# EAGLE board IG1_LEDProjekt (EAGLE 9.7.0)

Size 87.97 x 144.84 mm. Coordinates in mm from the lower left corner, seen from the top.
Outline: 0,0 87.97,0 87.97,144.84 0,144.84 0,0
Copper layers (1*16): Top 0.035mm / dielectric 1.5mm / Bottom 0.035mm
Design rules "default": minimum track width 6mil, minimum drill 0.35mm, track to track 6mil, track to pad 6mil, pad to pad 6mil, via to via 6mil, smd to smd 6mil, copper to edge 40mil, drill to drill 6mil, minimum pad ring 10mil, minimum via ring 8mil, stop-mask expansion 4mil, vias tented up to drill 0mil, thermal gap 10mil

## Footprints (pad centres in the part's own frame; a part is rotated, then mirrored left to right if it is on the bottom)
LEDRD254W60D565H860B_G = drill 0.981 pad 1.581: 1 -1.27,0; 2 1.27,0
LEDRD254W60D565H860B_Y = drill 0.981 pad 1.581: 1 -1.27,0; 2 1.27,0
LEDRD254W60D565H860B = drill 0.981 pad 1.581: 1 -1.27,0; 2 1.27,0
LEDRD254W60D565H860B_B = drill 0.981 pad 1.581: 1 -1.27,0; 2 1.27,0
HC-SR04 = drill 1.016 long: 1 -3.81,0; 2 -1.27,0; 3 1.27,0; 4 3.81,0
RESAD1016W63L850D250B = drill 0.83 pad 1.43: 1 -5.08,0; 2 5.08,0
SWITCH-MOMENTARY-PTH-6.5MM = drill 1.016 pad 1.88: 1 -3.251,2.261; 2 3.251,2.261; 3 -3.251,-2.261; 4 3.251,-2.261
ARDUINO-UNO-R3-SHIELD = drill 1.016 pad 1.88: 3.3V 24.13,-2.54; 5V 24.13,0; A0 24.13,12.7; A1 24.13,15.24; A2 24.13,17.78; A3 24.13,20.32; A4 24.13,22.86; A5 24.13,25.4; AREF -24.13,-13.97; D2 -24.13,20.32; D3 -24.13,17.78; D4 -24.13,15.24; D5 -24.13,12.7; D6 -24.13,10.16; D7 -24.13,7.62; D8 -24.13,3.81; D9 -24.13,1.27; D10 -24.13,-1.27; D11 -24.13,-3.81; D12 -24.13,-6.35; D13 -24.13,-8.89; GND@0 24.13,2.54; GND@1 24.13,5.08; GND@2 -24.13,-11.43; IOREF 24.13,-7.62; NC 24.13,-10.16; RES 24.13,-5.08; RX -24.13,25.4; SCL -24.13,-19.05; SDA -24.13,-16.51; TX -24.13,22.86; VIN 24.13,7.62

## Placement (x,y rotation side)
D1  GREEN  [LEDRD254W60D565H860B_G]  11.14,132.14 180 top
D2  GREEN  [LEDRD254W60D565H860B_G]  16.22,132.14 180 top
D3  YELLOW  [LEDRD254W60D565H860B_Y]  21.3,132.14 180 top
D4  YELLOW  [LEDRD254W60D565H860B_Y]  26.38,132.14 180 top
D5  RED  [LEDRD254W60D565H860B]  31.46,132.14 180 top
D6  RED  [LEDRD254W60D565H860B]  36.54,132.14 180 top
D7  BLUE  [LEDRD254W60D565H860B_B]  6.06,132.14 180 top
DIST1  DISTANCE-SENSOR-4PINHC-SR04  [HC-SR04]  61.94,137.22 0 top
R1  470  [RESAD1016W63L850D250B]  12.41,121.98 90 top
R2  470  [RESAD1016W63L850D250B]  17.49,121.98 90 top
R3  470  [RESAD1016W63L850D250B]  22.57,121.98 90 top
R4  470  [RESAD1016W63L850D250B]  27.65,121.98 90 top
R5  470  [RESAD1016W63L850D250B]  32.73,121.98 90 top
R6  470  [RESAD1016W63L850D250B]  37.81,121.98 90 top
R7  470  [RESAD1016W63L850D250B]  7.33,121.98 90 top
S1  SWITCH_MOMENTARY  [SWITCH-MOMENTARY-PTH-6.5MM]  70.83,123.25 90 top
U2  ARDUINO-UNO-R3-SHIELD  [ARDUINO-UNO-R3-SHIELD]  45.58,47.88 0 top

## Library data of the parts
D1 D2 = Tinkercad; CATEGORY: Opto-Electronic; SUB-CATEGORY: LED; VALUE: LED_GREEN
D3 D4 = Tinkercad; CATEGORY: Opto-Electronic; SUB-CATEGORY: LED; VALUE: LED_YELLOW
D5 D6 = Tinkercad; CATEGORY: Opto-Electronic; SUB-CATEGORY: LED; VALUE: LED_RED
D7 = Tinkercad; CATEGORY: Opto-Electronic; SUB-CATEGORY: LED; VALUE: LED_BLUE
DIST1 R1-R7 S1 U2 = Tinkercad

## Nets
U2_5V: D1.1 D2.1 D3.1 D4.1 D5.1 D6.1 D7.1 DIST1.1 R1.2 R2.2 R3.2 R4.2 R5.2 R6.2 R7.2 U2.5V
U2_A0: DIST1.2 U2.A0
U2_A1: R7.1 U2.A1
U2_D2: R3.1 U2.D2
U2_D3: R4.1 U2.D3
U2_D4: R5.1 U2.D4
U2_D5: R6.1 U2.D5
U2_D8: S1.3 S1.4 U2.D8
U2_GND: D1.2 D2.2 D3.2 D4.2 D5.2 D6.2 D7.2 DIST1.3 S1.1 S1.2 U2.GND@0 U2.GND@1 U2.GND@2
U2_RX: R1.1 U2.RX
U2_TX: R2.1 U2.TX

## Tracks (layer width: path | path; a pad name or v marks a point on that pad's centre or on a via)
U2_5V  (15 unrouted)
U2_A0  (1 unrouted)
U2_A1  (1 unrouted)
U2_D2  (1 unrouted)
U2_D3  (1 unrouted)
U2_D4  (1 unrouted)
U2_D5  (1 unrouted)
U2_D8  (2 unrouted)
U2_GND  (12 unrouted)
U2_RX  (1 unrouted)
U2_TX  (1 unrouted)